# Altium PCB R6DSX04M_r0.PcbDoc
Units mil, origin at the board's own origin, x right, y up, seen from the top; angles counter-clockwise.
Board outline 10008.32 x 4692.91 mil, 2 copper layers (Top Layer, Top, Bottom Layer, Bottom); 6 components, 0 nets, 86 pads, 0 vias.
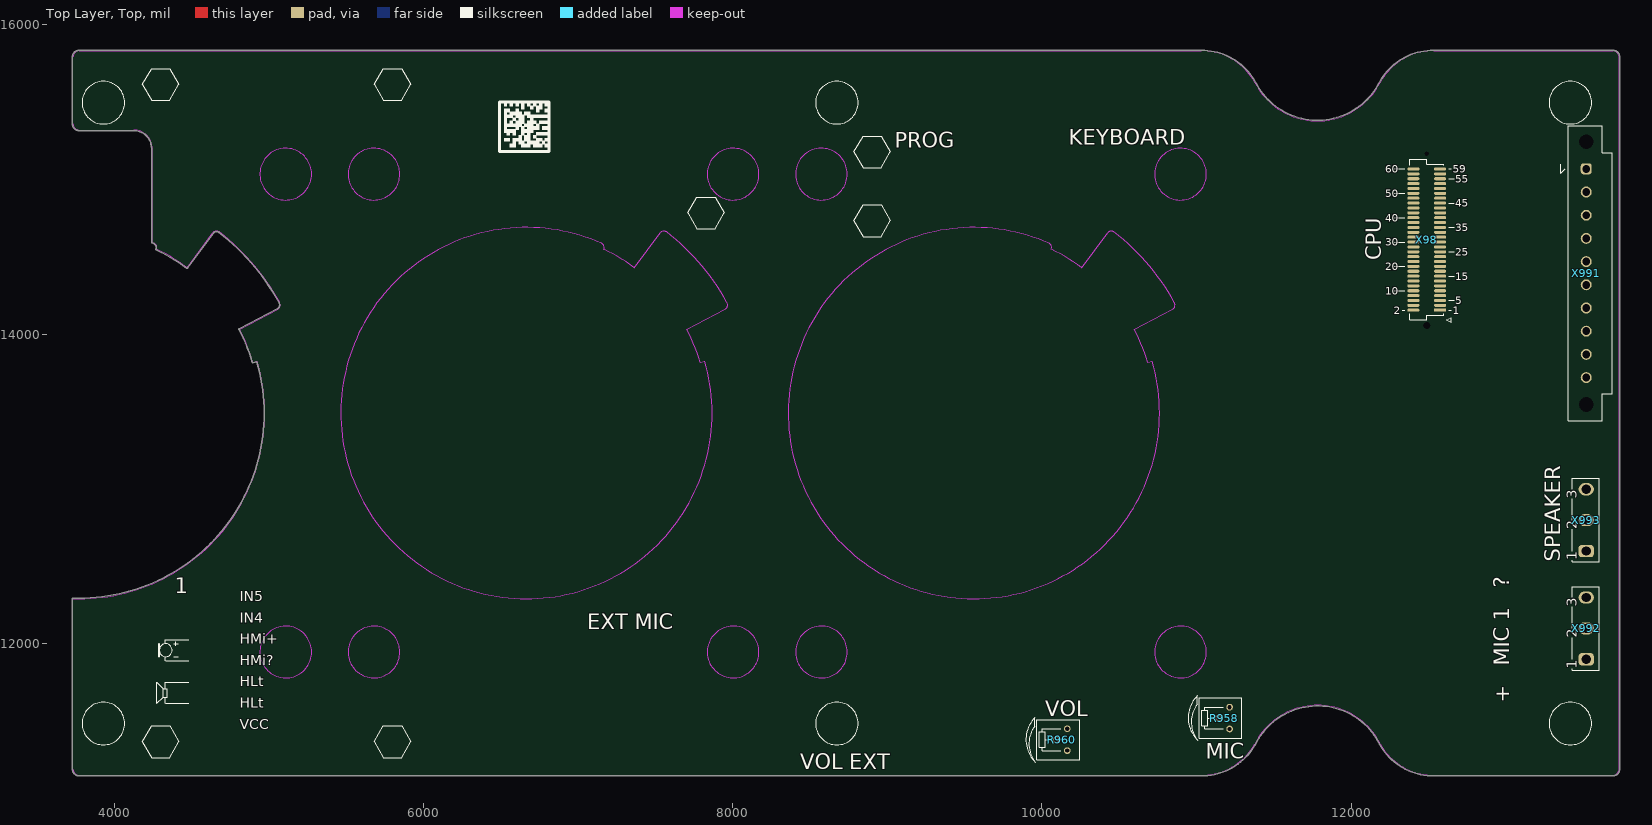
[diagram p0: Top Layer, Top view]
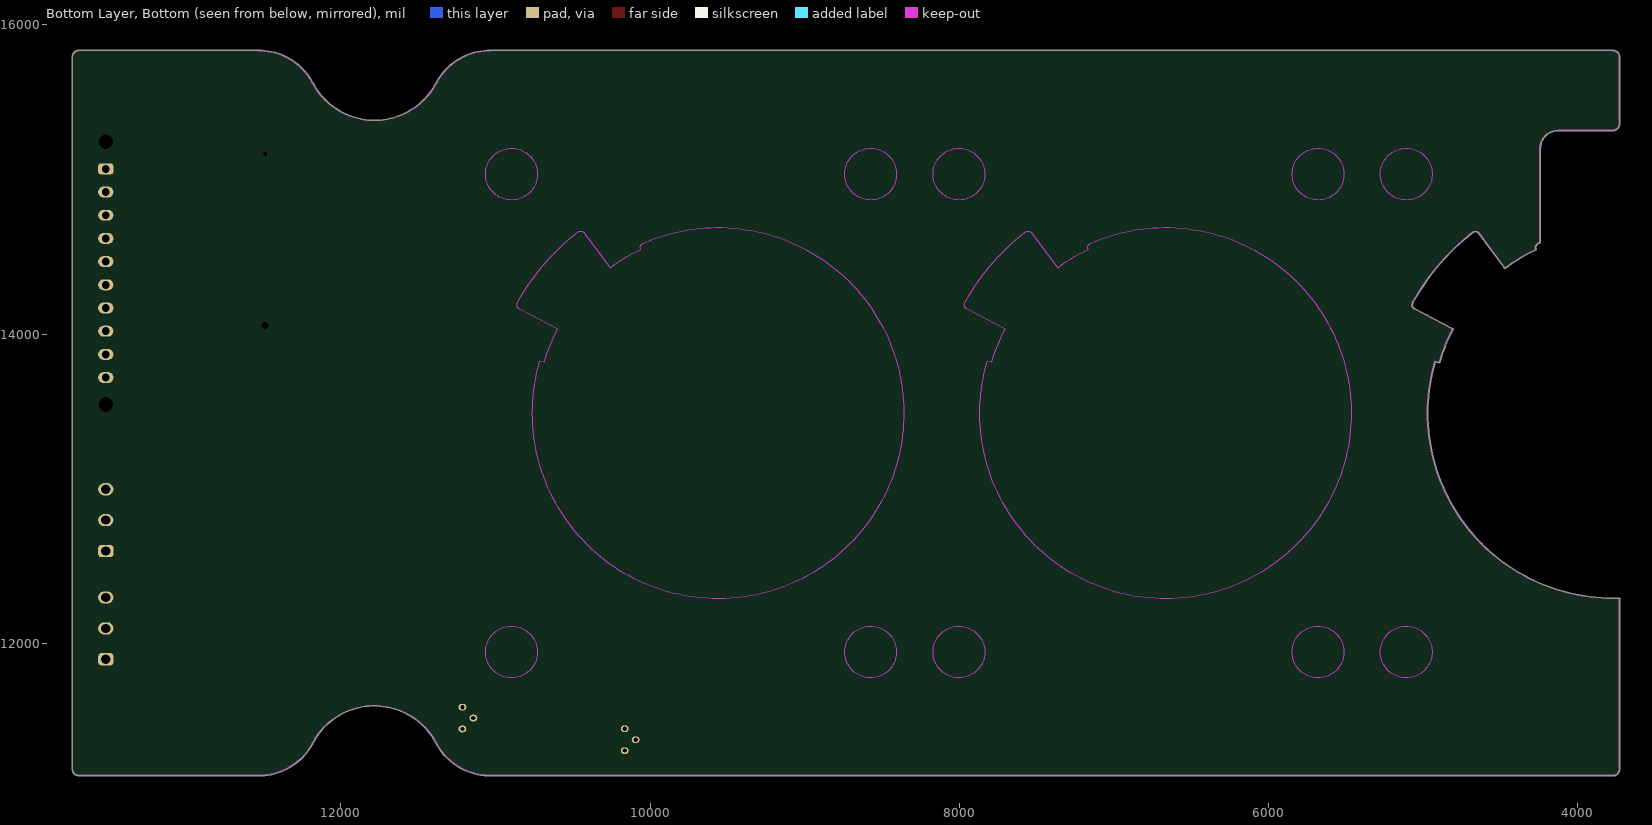
[diagram p1: Bottom Layer, Bottom view, seen from below]

## Layer stack, top to bottom
Top Solder, Top Mask: solder mask 0.4, Solder Resist, Dk 3.5
Top Layer, Top: signal copper 1.4
Dielectric 1: dielectric 12.6, FR-4, Dk 4.8
Bottom Layer, Bottom: signal copper 1.4
Bottom Solder, Bot Mask: solder mask 0.4, Solder Resist, Dk 3.5

## Board outline
3729.53,11185.83 3729.53,12286.77 cw(c3733.01,12288.6) 3733.14,12292.54 3733.64,12292.52 ccw(c3772.83,13488.98) 4969.93,13488.98 ccw(c3772.83,13488.98) 4923.2,13820.2 4898.18,13813.36 cw(c4897.15,13817.16) 4893.3,13816.33 4893.21,13816.6 ccw(c3772.84,13488.98) 4807.3,14029.78 4807.26,14029.85 cw(c4810.7,14031.76) 4808.88,14035.25 5054.72,14163.77 5054.76,14163.8 ccw(c5041.6,14188.96) 5070,14188.96 ccw(c5041.6,14188.96) 5066.79,14202.08 5066.6,14202.52 5066.28,14203 ccw(c3772.83,13488.98) 4676.56,14657.78 ccw(c4661.97,14637.54) 4641.8,14652.23 4641.73,14652.14 4474.61,14427.35 cw(c4471.22,14429.35) 4468.9,14426.17 4468.81,14426.23 ccw(c3772.84,13488.98) 4271.73,14544.41 4271.58,14544.48 cw(c4272.9,14548.19) 4269.33,14549.85 ccw(c4246.34,14560.52) 4271.69,14560.52 ccw(c4246.34,14560.52) 4257.35,14583.36 4257.01,14583.5 4243.66,14589.59 4243.64,14589.59 cw(c4245.28,14593.18) 4241.34,14593.18 4241.34,15201.57 ccw(c4127.17,15201.57) 4127.17,15315.75 3772.83,15315.75 cw(c3772.83,15359.05) 3729.53,15359.05 3729.53,15792.13 cw(c3772.83,15792.13) 3772.78,15835.43 3772.83,15835.43 11031.21,15835.43 cw(c11033.86,15437.8) 11381.3,15631.19 11381.47,15630.86 11381.58,15630.64 ccw(c11782.68,15831.5) 12184.12,15631.34 12184.41,15631.84 cw(c12531.5,15437.8) 12534.14,15835.43 13694.09,15835.43 13694.15,15835.43 cw(c13694.09,15792.13) 13737.4,15792.13 13737.4,11185.83 cw(c13694.09,11185.83) 13694.39,11142.52 13694.36,11142.52 13694.09,11142.52 13694.02,11142.52 12533.99,11142.52 cw(c12531.5,11540.15) 12184.05,11346.76 cw(c12187.49,11348.68) 12183.59,11349.21 ccw(c11783.46,11146.46) 11382.01,11346.61 cw(c11378.49,11348.37) 11380.22,11344.83 cw(c11033.86,11540.15) 11031.34,11142.52 3772.83,11142.52 cw(c3772.83,11185.83)

## Design rules (kind name [scope] priority, off if disabled: settings)
Clearance [All] p1: gap=10 ignorepadtopadclearanceinfootprint=FALSE except(0: Arc-Hole Track-Hole SMDPad-Hole THPad-Hole Via-Hole Fill-Hole Poly-Hole Region-Hole Text-Hole; 7.87: Arc-Arc Arc-Track Arc-THPad Arc-Via Track-Track Track-THPad Track-Via THPad-THPad THPad-Via Via-Via)
PlaneClearance [All] p1: clearance=10
PolygonConnect [All] p1: connectstyle=Relief reliefconductorwidth=10 reliefentries=4 polygonreliefangle="90 Angle" airgapwidth=10
RoutingVias [All] p1: holewidth=28 width=50 viastyle="Through Hole" minholewidth=28 minwidth=50 maxholewidth=28 maxwidth=50
SolderMaskExpansion [All] p1: expansion=4 istentingtop=FALSE
Width [All] p1: maxlimit=10 minlimit=10 preferedwidth=10
29 further rules are at their usual default settings.

## Components (designator, comment, footprint, x,y, rotation, side; value= is the part's Value field where it differs from the comment)
R958 "100K" "3362H SQUARE TRIMMING POTENT52" 11143.46,11516.46 r90 top
R960 "100K" "3362H SQUARE TRIMMING POTENT52" 10093.46,11376.46 r90 top
X98 "5177983-2" "CONNECTOR 5177983-2" 12489.38,14611.04 r180 top
X991 "Connector 10 pins (universal)" "Connector 15EDGVM-3.81-10P_Connector_15EDGVM-3.81-10P(Primary)" 13520.87,14393.69 r270 top
X992 "62395-1 (3ps)" "Faston Connector 3 x 2.8 mm" 13520.87,12096.46 r90 top
X993 "62395-1 (3ps)" "Faston Connector 3 x 2.8 mm" 13520.87,12796.46 r90 top

## Footprints (in the part's own frame and the unit in brackets; to place one, negate y for a bottom-side part, rotate by r counter-clockwise, add the part's x,y. Pads: shape width x height; smd on the part's side, far side on the other; paste and mask are expansions set on the pad)
"3362H SQUARE TRIMMING POTENT52" [mm]
  round 1.1 / inner round 0 / far side oval 1.1x1.3 hole 0.7: 1(-1.792,-1.8) 2(0,0) 3(1.792,-1.8)
  silkscreen extent -3.67,-3.81 3.64,4.99
"Connector 15EDGVM-3.81-10P_Connector_15EDGVM-3.81-10P(Primary)" [mm]
  round 0 hole 2.4: 0(-21.565,0) 0_1(21.565,0)
  rrect50% 1.8x1.8 / inner round 1.8 / far side rrect50% 1.8x2.5 hole 1.3: 1(-17.145,0)
  round 1.8 / inner round 1.8 / far side oval 1.8x2.5 hole 1.3: 2(-13.335,0) 3(-9.525,0) 4(-5.715,0) 5(-1.905,0) 6(1.905,0) 7(5.715,0) 8(9.525,0) 9(13.335,0) 10(17.145,0)
  silkscreen extent -24.25,-4.19 24.24,4.26
"CONNECTOR 5177983-2" [mm]
  rect 2x0.5 smd: 1(-2.2,11.6)
  oval 2x0.5 smd: 2(2.2,11.6) 3(-2.2,10.8) 4(2.2,10.8) 5(-2.2,10) 6(2.2,10) 7(-2.2,9.2) 8(2.2,9.2) 9(-2.2,8.4) 10(2.2,8.4) 11(-2.2,7.6) 12(2.2,7.6) 13(-2.2,6.8) 14(2.2,6.8) 15(-2.2,6) 16(2.2,6) 17(-2.2,5.2) 18(2.2,5.2) 19(-2.2,4.4) 20(2.2,4.4) 21(-2.2,3.6) 22(2.2,3.6) 23(-2.2,2.8) 24(2.2,2.8) 25(-2.2,2) 26(2.2,2) 27(-2.2,1.2) 28(2.2,1.2) 29(-2.2,0.4) 30(2.2,0.4) 31(-2.2,-0.4) 32(2.2,-0.4) 33(-2.2,-1.2) 34(2.2,-1.2) 35(-2.2,-2) 36(2.2,-2) 37(-2.2,-2.8) 38(2.2,-2.8) 39(-2.2,-3.6) 40(2.2,-3.6) 41(-2.2,-4.4) 42(2.2,-4.4) 43(-2.2,-5.2) 44(2.2,-5.2) 45(-2.2,-6) 46(2.2,-6) 47(-2.2,-6.8) 48(2.2,-6.8) 49(-2.2,-7.6) 50(2.2,-7.6) 51(-2.2,-8.4) 52(2.2,-8.4) 53(-2.2,-9.2) 54(2.2,-9.2) 55(-2.2,-10) 56(2.2,-10) 57(-2.2,-10.8) 58(2.2,-10.8) 59(-2.2,-11.6) 60(2.2,-11.6)
  round 0 hole 1.2: 61(0,14.1)
  round 0 hole 0.8: 62(0,-14.1)
  silkscreen extent -4,-13.2 2.8,13.6
"Faston Connector 3 x 2.8 mm" [mm]
  rrect50% 2x2.5 hole 1.5: 1(-5.08,0)
  oval 2x2.5 hole 1.5: 2(0,0) 3(5.08,0)
  silkscreen extent -6.86,-2.16 6.86,2.29

## Nets (pads, with @x,y where several pads share a name; then routed paths per layer and width w, separated by ;. In a path a pad name is that pad's centre, name@x,y a point inside that pad or via, vN(x,y) a via of type N, cw(c..) or ccw(c..) an arc to the next point about the centre after c; other vN are vias at no path point)
pads on no net: R958.1 R958.2 R958.3 R960.1 R960.2 R960.3 X98.1 X98.2 X98.3 X98.4 X98.5 X98.6 X98.7 X98.8 X98.9 X98.10 X98.11 X98.12 X98.13 X98.14 X98.15 X98.16 X98.17 X98.18 X98.19 X98.20 X98.21 X98.22 X98.23 X98.24 X98.25 X98.26 X98.27 X98.28 X98.29 X98.30 X98.31 X98.32 X98.33 X98.34 X98.35 X98.36 X98.37 X98.38 X98.39 X98.40 X98.41 X98.42 X98.43 X98.44 X98.45 X98.46 X98.47 X98.48 X98.49 X98.50 X98.51 X98.52 X98.53 X98.54 X98.55 X98.56 X98.57 X98.58 X98.59 X98.60 X98.61 X98.62 X991.0 X991.0_1 X991.1 X991.2 X991.3 X991.4 X991.5 X991.6 X991.7 X991.8 X991.9 X991.10 X992.1 X992.2 X992.3 X993.1 X993.2 X993.3

## Keep-outs
Keep-Out Layer, Board:
  circle w1.97: c10896.85,15034.44 r167.32
  circle w1.97: c10896.85,11943.51 r167.32
  circle w1.97: c8574.02,15034.44 r167.32
  circle w1.97: c8574.02,11943.51 r167.32
  circle w1.97: c5109.45,15034.38 r167.32
  circle w1.97: c5109.45,11943.44 r167.32
  circle w1.97: c8003.15,15034.44 r167.32
  circle w1.97: c8003.15,11943.51 r167.32
  circle w1.97: c5680.31,15034.44 r167.32
  circle w1.97: c5680.31,11943.51 r167.32
  lines w7.87: 3733.01,12288.6 ccw(c3772.83,13488.98) 4926.18,13824.05 ; 3733.46,12288.59 3733.46,11185.83 ccw(c3772.83,11185.83) 3772.83,11146.46 11031.4,11146.46 ; 4272.9,14548.19 ccw(c4246.34,14560.52) 4258.67,14587.09 4245.28,14593.18 4245.28,15201.57 ccw(c4127.17,15201.57) 4127.17,15319.68 3772.83,15319.68 cw(c3772.83,15359.05) 3733.46,15359.05 3733.46,15792.13 cw(c3772.83,15792.13) 3772.83,15831.5 11031.4,15831.5 ; 4273.42,14547.97 cw(c3772.84,13488.98) 4471.22,14429.35 4638.57,14654.49 cw(c4661.97,14637.54) 4678.91,14660.94 ; 4678.74,14661.08 cw(c3772.83,13488.98) 5069.73,14204.9 ; 4810.7,14031.76 5056.54,14160.28 ccw(c5041.6,14188.96) 5070.29,14203.89 ; 4810.78,14031.6 cw(c3772.84,13488.98) 4896.99,13817.7 ; 4897.15,13817.16 4925.66,13824.96 ; 7152.37,14587.09 cw(c7140.04,14560.52) 7166.6,14548.19 ; 7153.02,14586.8 ccw(c6666.54,13488.98) 7819.64,13823.99 ; 7167.12,14547.97 cw(c6666.54,13488.98) 7364.92,14429.35 7532.27,14654.49 cw(c7555.67,14637.54) 7572.61,14660.94 ; 7572.44,14661.08 cw(c6666.54,13488.98) 7963.43,14204.9 ; 7704.4,14031.76 7950.24,14160.28 ccw(c7935.3,14188.96) 7963.99,14203.89 ; 7704.49,14031.6 cw(c6666.54,13488.98) 7790.69,13817.7 ; 7790.85,13817.16 7819.36,13824.96 ; 10046.07,14587.09 cw(c10033.74,14560.52) 10060.3,14548.19 ; 10046.73,14586.8 ccw(c9560.24,13488.98) 10713.34,13823.99 ; 10060.82,14547.97 cw(c9560.24,13488.98) 10258.62,14429.35 10425.97,14654.49 cw(c10449.37,14637.54) 10466.31,14660.94 ; 10466.14,14661.08 cw(c9560.24,13488.98) 10857.13,14204.9 ; 10598.1,14031.76 10843.94,14160.28 ccw(c10829,14188.96) 10857.69,14203.89 ; 10598.19,14031.6 cw(c9560.24,13488.98) 10684.39,13817.7 ; 10684.55,13817.16 10713.06,13824.96 ; 11031.11,11146.46 ccw(c11033.86,11540.15) 11377.86,11348.68 ; 11031.11,15831.49 cw(c11033.86,15437.8) 11377.86,15629.27 ; 11378.06,15628.88 ccw(c11782.68,15831.5) 12187.64,15629.59 ; 11378.49,11348.37 cw(c11783.46,11146.46) 12188.07,11349.07 ; 12187.49,11348.68 ccw(c12531.5,11540.15) 12534.24,11146.46 ; 12187.49,15629.27 cw(c12531.5,15437.8) 12534.24,15831.49 ; 12533.96,11146.46 13694.36,11146.46 ; 12533.96,15831.5 13694.09,15831.5 cw(c13694.09,15792.13) 13733.47,15792.13 13733.47,11185.83 cw(c13694.09,11185.83) 13694.09,11146.46

## Silkscreen, mask and mechanical layers (free items; w line width, h text height)
Top Overlay, Top Silk:
  drawing of 1388 lines, arcs and shapes, not listed
  text "KEYBOARD" at 10173.86,15225.21 h98.43
  text "PROG" at 9049.8,15206.31 h98.43
  text "60" at 12222.44,15042.53 h49.21
  text "59" at 12657.88,15042.53 h49.21
  text "55" at 12673.63,14979.54 h49.21
  text "50" at 12222.44,14885.05 h49.21
  text "45" at 12673.63,14822.06 h49.21
  text "40" at 12222.44,14727.57 h49.21
  text "35" at 12673.63,14664.58 h49.21
  text "30" at 12222.44,14570.09 h49.21
  text "25" at 12673.63,14507.1 h49.21
  text "CPU" at 12194.89,14476.26 h98.43 r90
  text "20" at 12222.44,14412.61 h49.21
  text "15" at 12673.63,14349.62 h49.21
  text "10" at 12222.44,14255.13 h49.21
  text "5" at 12673.63,14192.14 h49.21
  text "2" at 12276.78,14129.14 h49.21
  text "1" at 12657.88,14129.14 h49.21
  text "SPEAKER" at 13353.95,12526.46 h98.43 r90
  text "1" at 4392.03,12322.81 h98.43
  text "IN5" at 4812.6,12272.28 h65.62
  text "IN4" at 4812.6,12134.49 h65.62
  text "EXT MIC" at 7060.24,12091.34 h98.43
  text "HMi+" at 4812.6,11996.69 h65.62
  text "HMi?" at 4812.6,11858.9 h65.62
  text "HLt" at 4812.6,11721.1 h65.62
  text "+   MIC 1   ?" at 13023.62,11614.17 h98.43 r90
  text "HLt" at 4812.6,11583.31 h65.62
  text "VOL" at 10020.87,11528.35 h98.43
  text "VCC" at 4812.6,11445.51 h65.62
  text "MIC" at 11060.24,11252.76 h98.43
  text "VOL EXT" at 8438.19,11185.83 h98.43

## Text inside footprints (layer, text, board x,y; h text height)
X992: Top Overlay, Top Silk "3" at 13460.87,12236.46 h65.62 r90; Top Overlay, Top Silk "1" at 13460.87,11836.46 h65.62 r90; Top Overlay, Top Silk "2" at 13460.87,12036.46 h65.62 r90
X993: Top Overlay, Top Silk "3" at 13460.87,12936.46 h65.62 r90; Top Overlay, Top Silk "1" at 13460.87,12536.46 h65.62 r90; Top Overlay, Top Silk "2" at 13460.87,12736.46 h65.62 r90